# Altium PCB Prosthetic_Arm_PCB.PcbDoc
Units mm, origin at the board's own origin, x right, y up, seen from the top; angles counter-clockwise.
Board outline 72.9 x 89.79 mm, 2 copper layers (Top Layer, Bottom Layer), stack 1.671 mm thick; 4 components, 5 nets, 25 pads, 0 vias.
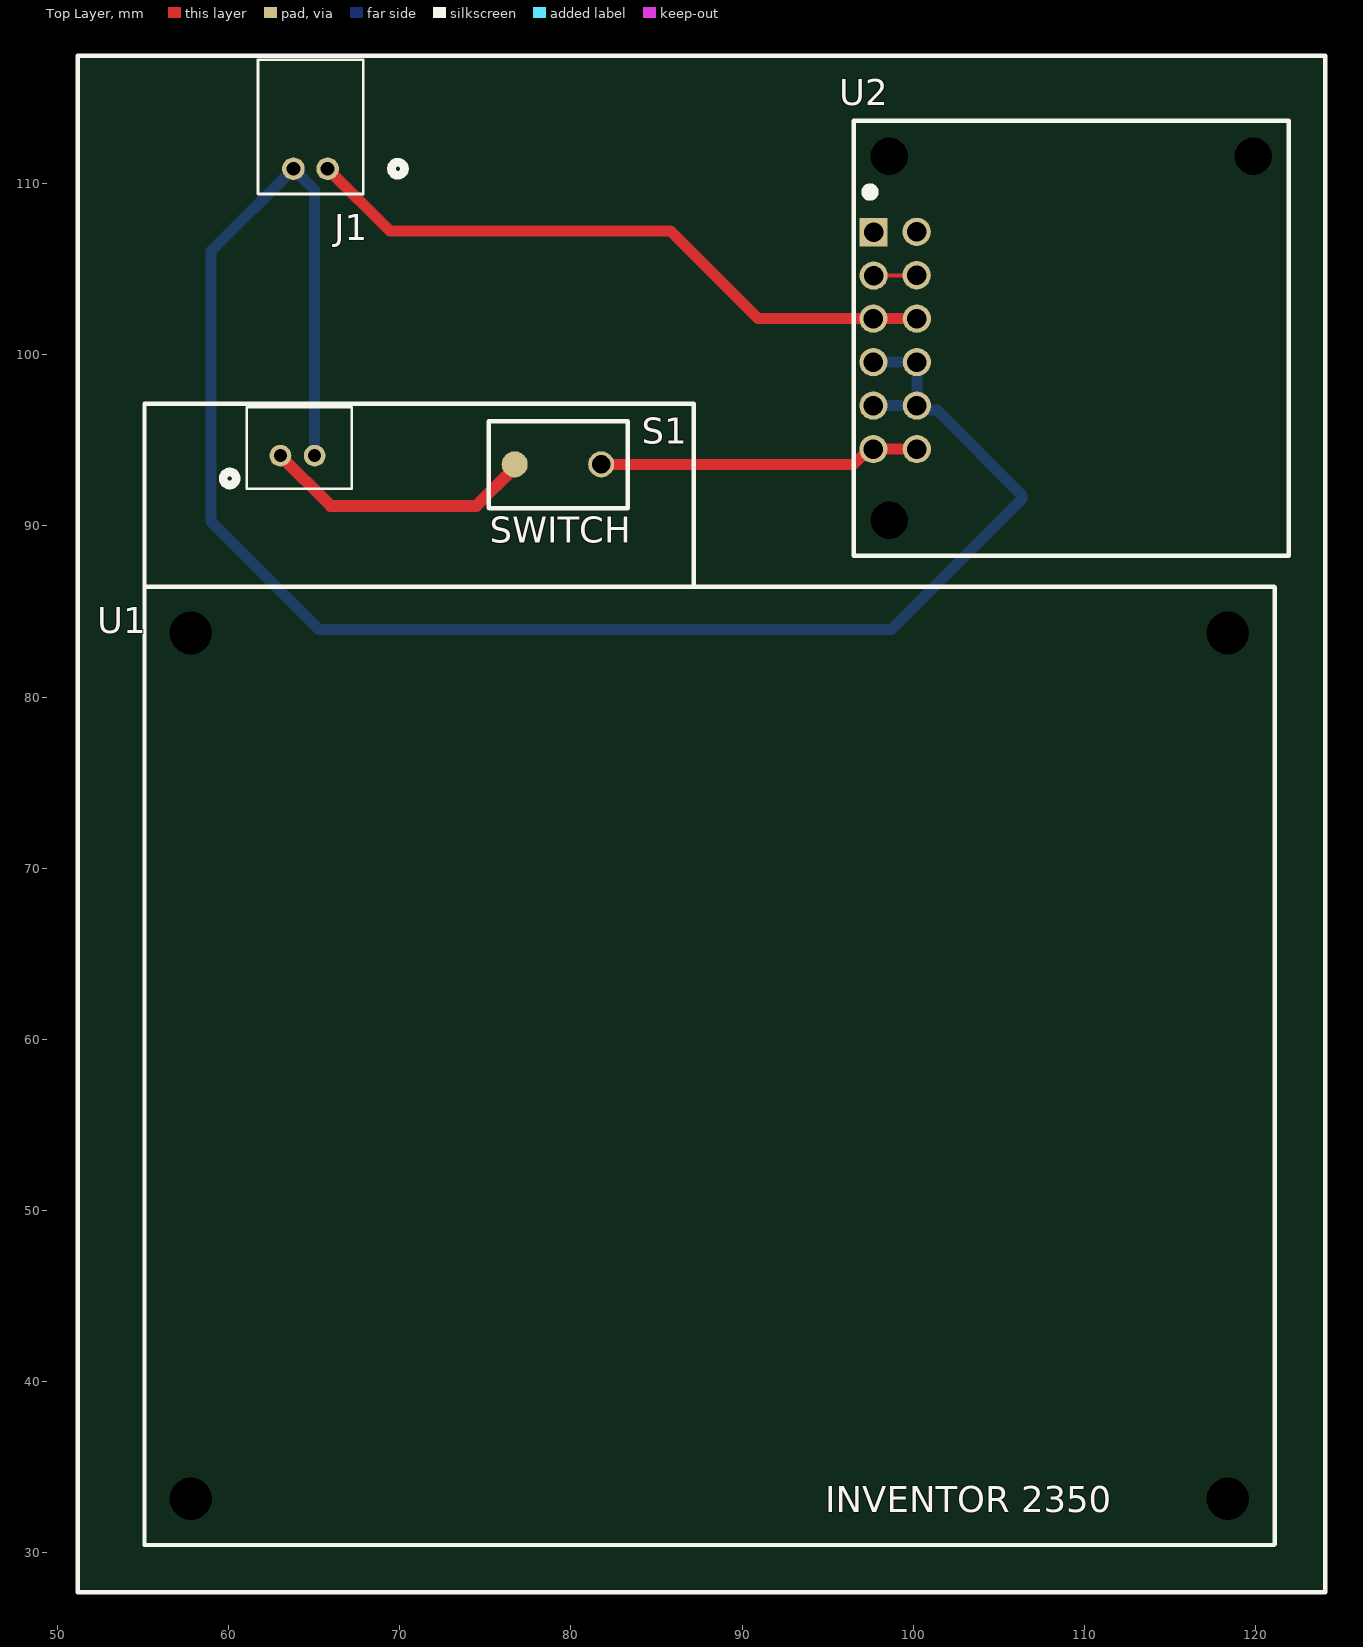
[diagram p0: Top Layer view]
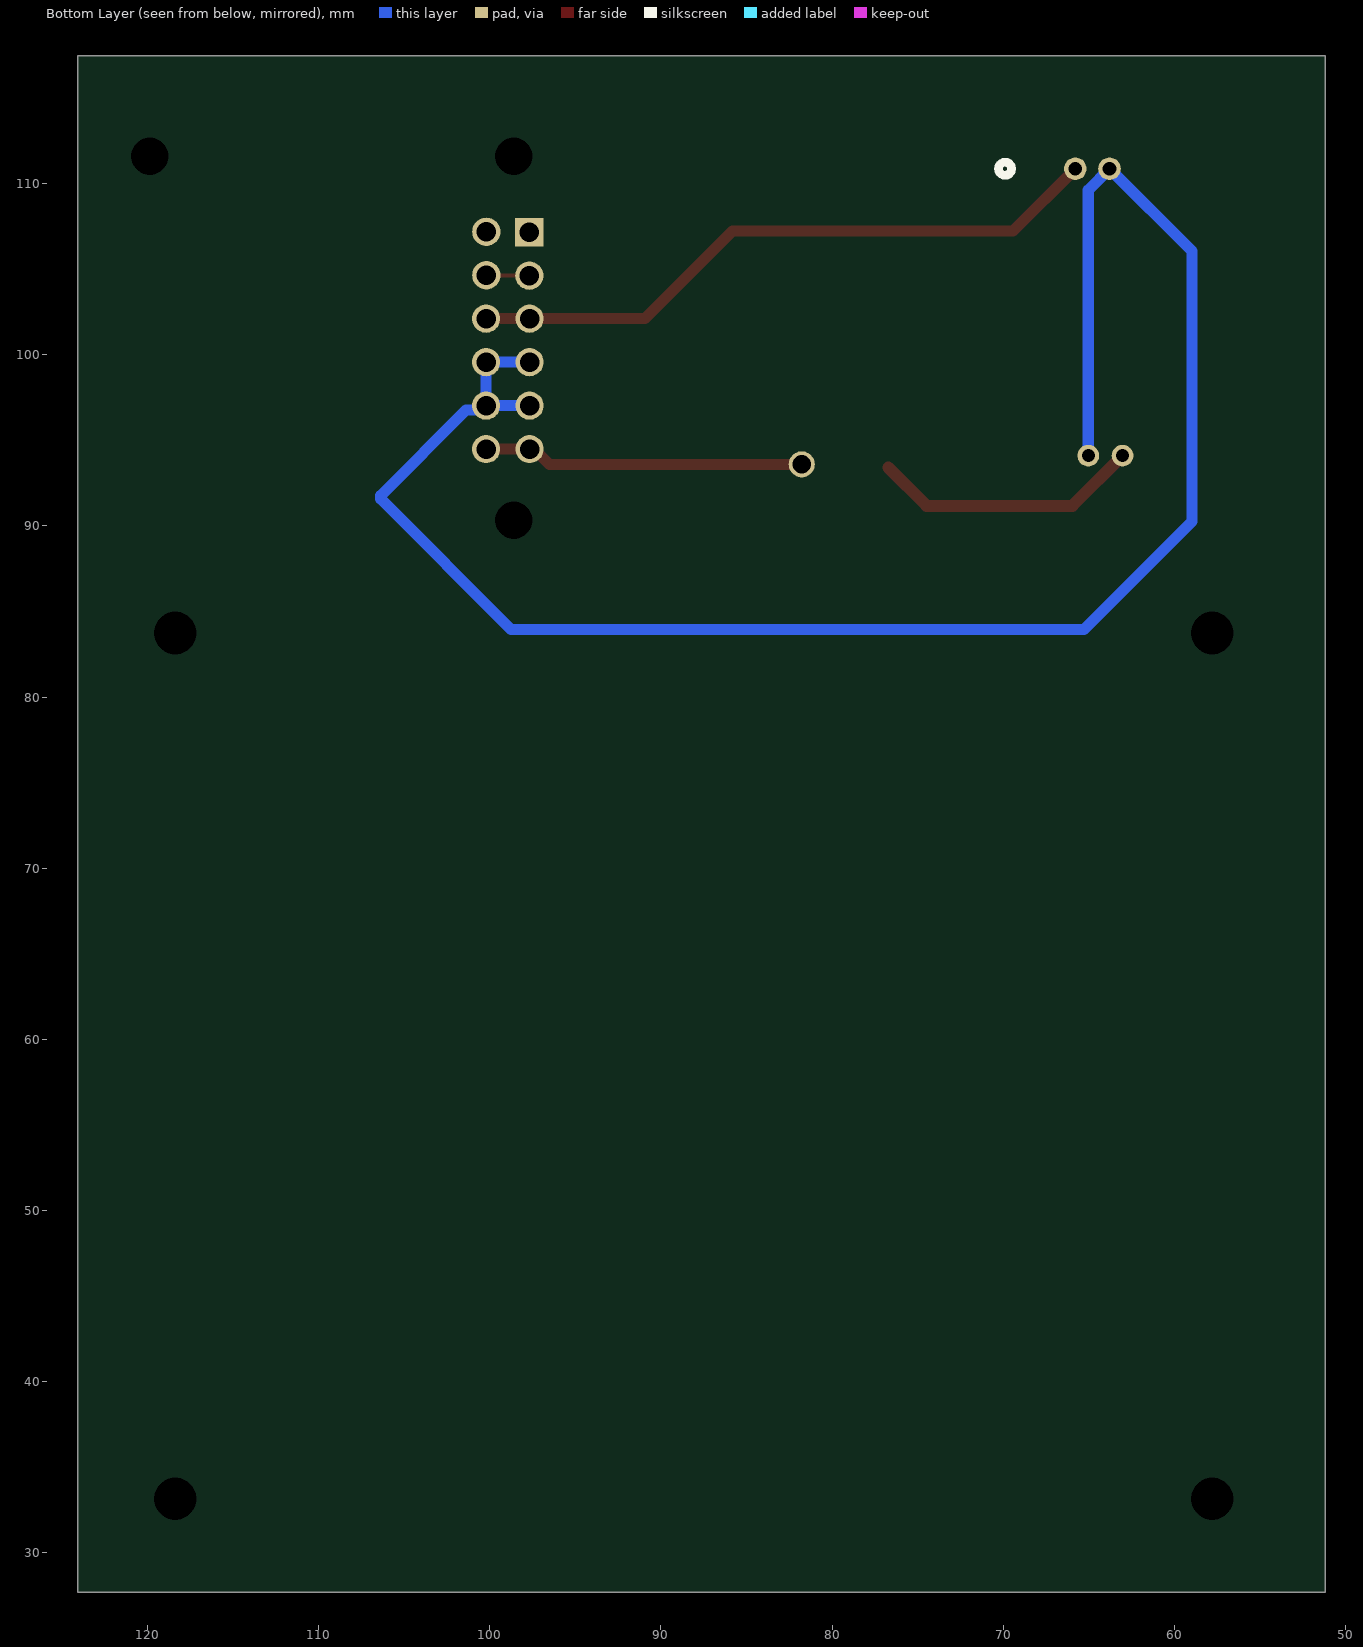
[diagram p1: Bottom Layer view, seen from below]
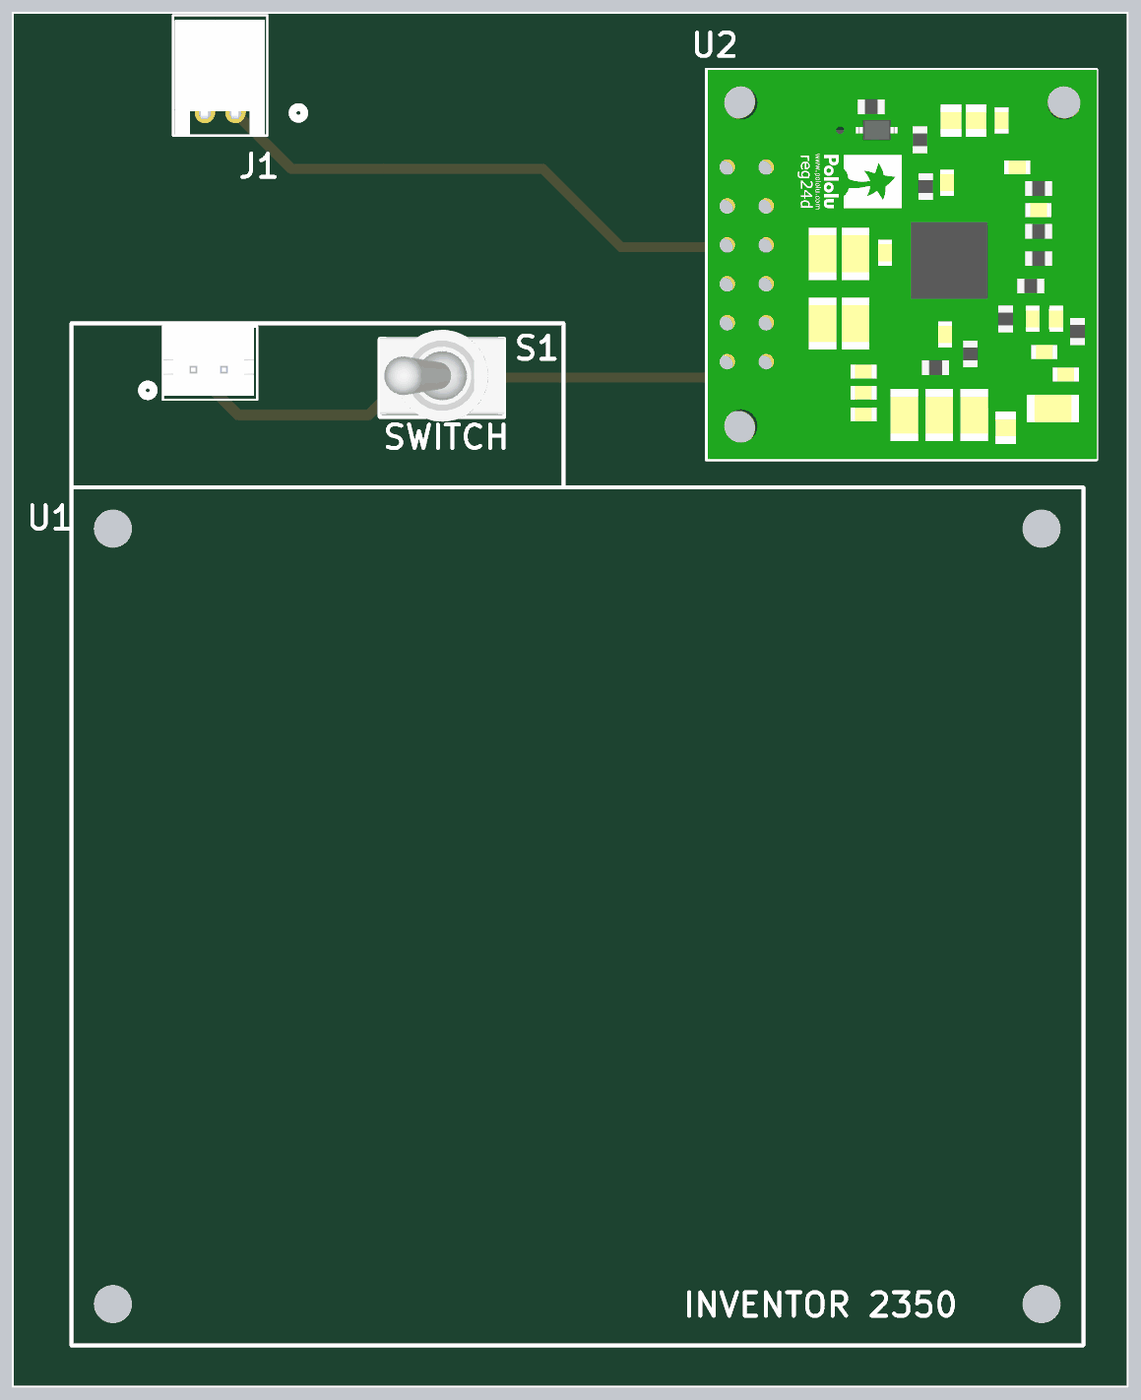
[diagram p2: 3D render of the assembled board from above, using the file's embedded part models]

## Layer stack, top to bottom
Top Solder: solder mask 0.0102, Solder Resist, Dk 3.5
Top Layer: signal copper 0.0356
Dielectric 1: dielectric 1.6, FR-4, Dk 4.8
Bottom Layer: signal copper 0.0356
Bottom Solder: solder mask 0.0102, Solder Resist, Dk 3.5

## Board outline
51.181,27.686 51.181,117.475 124.079,117.475 124.079,27.686

## Design rules (kind name [scope] priority, off if disabled: settings)
Clearance [All] p1: gap=0.254 ignorepadtopadclearanceinfootprint=FALSE
PolygonConnect [All] p1: connectstyle=Relief reliefconductorwidth=0.254 reliefentries=4 polygonreliefangle="90 Angle" airgapwidth=0.254
RoutingVias [All] p1: holewidth=0.711 width=1.27 viastyle="Through Hole" minholewidth=0.711 minwidth=1.27 maxholewidth=0.711 maxwidth=1.27
SolderMaskExpansion [All] p1: expansion=0 istentingtop=FALSE
Width [All] p1: maxlimit=1 minlimit=0.254 preferedwidth=0.254
30 further rules are at their usual default settings.

## Components (designator, comment, footprint, x,y, rotation, side; value= is the part's Value field where it differs from the comment)
J1 "S2B-PH-K-S(LF)(SN)" CONN_S2B-PH-K-S_JST 65.786,110.871 r180 top
S1 "200MSP6T1B1M5RE" SWITCH 78.875,93.7 r0 top
U1 "Inventor 2350" INVENTOR_2350 55.085,30.447 r0 top
U2 "" D36V50F5_ 111.252,108.585 r270 top

## Footprints (in the part's own frame and the unit in brackets; to place one, negate y for a bottom-side part, rotate by r counter-clockwise, add the part's x,y. Pads: shape width x height; smd on the part's side, far side on the other; paste and mask are expansions set on the pad)
CONN_S2B-PH-K-S_JST [mil]
  round 52 hole 32 paste-99999 mask+0: 1(0,0) 2(78.74,0)
  silkscreen extent -177,-251 160,58, body extent -76,-240 156,59, height 189
D36V50F5_ [mil]
  round 60 hole 85.83 paste-99999 mask+0: 1(-119.09,339.57) 2(-119.09,-498.03) 3(718.5,-498.03)
  round 65 / inner round 60 / far side round 65 hole 45 paste-99999 mask+0: 1(554.92,-434.45) 2(554.92,-534.45) 3(454.92,-434.45) 4(454.92,-534.45) 5(354.92,-434.45) 6(354.92,-534.45) 7(254.92,-434.45) 8(254.92,-534.45) 9(155,-435) 10(156,-534) 11(55,-435)
  rect 65x65 / inner round 60 / far side rect 65x65 hole 45 paste-99999 mask+0: 12(56,-534)
  silkscreen extent -201,-580 800,421, body extent -201,-577 799,423, height 133
INVENTOR_2350 [mm]
  round 1.27 hole 0.762 paste-2539.97 mask+0: 1(7.94,63.658) 2(9.94,63.658)
  round 1.524 hole 2.5 unplated: 3(2.7,53.3) 4(2.7,2.7) 5(63.3,2.7) 6(63.3,53.3)
  silkscreen extent 0,0 66.04,66.7, body extent 6,61.97 11.9,66.48, height 6
SWITCH [mil]
  round 60 smd: 1(-85,-4)
  round 60 hole 42.91: 2(114,-4)
  silkscreen extent -145,-105 175,95, body extent -144,-117 176,119, height 927

## Part data
J1: library part S2B-PH-K-SLFSN, "CONNECTOR; MALE; THROUGH HOLE; 2.0MM PITCH; DISCONNECTABLE CRIMP STYLE CONNECTOR; SIDE ENTRY TYPE; RIGHT ANGLE; 2PINS", Manufacturer_Name=JST, Copyright="Copyright (C) 2025 Ultra Librarian. All rights reserved.", Manufacturer_Part_Number=S2B-PH-K-S(LF)(SN), RefDes=RefDes, Type=Type
S1: "SPST Switch"
U2: library part D36V50F5, "5V, 5.5A Step-Down Voltage Regulator D36V50F5"

## Nets (pads, with @x,y where several pads share a name; then routed paths per layer and width w, separated by ;. In a path a pad name is that pad's centre, name@x,y a point inside that pad or via, vN(x,y) a via of type N, cw(c..) or ccw(c..) an arc to the next point about the centre after c; other vN are vias at no path point)
5V: S1.2 U2.1@100.217,94.49 U2.2@97.677,94.49 | length 18.8
  Top Layer w0.65: S1.2 96.515,93.598 97.406,94.49 97.677,94.49 U2.1@100.217,94.49
7v4: J1.1 U2.7 U2.8 | length 38.1
  Top Layer w0.65: J1.1 69.432,107.225 85.825,107.225 90.94,102.11 U2.8 U2.7
GND: J1.2 U1.2 U2.3@100.217,97.03 U2.4 U2.5 U2.6 | length 109.2
  Bottom Layer w0.65: U1.2 65.025,109.632 J1.2 58.975,106.06 58.975,90.25 65.278,83.947 98.747,83.947 106.37,91.57 106.37,91.78 101.387,96.763 100.484,96.763 U2.3@100.217,97.03 ; U2.4 U2.3@100.217,97.03 ; U2.6 U2.5 U2.3@100.217,97.03
VIN: S1.1 U1.1 | length 16
  Top Layer w0.254: S1.1@76.716,93.416 S1.1
  Top Layer w0.7: U1.1 65.955,91.175 74.475,91.175 S1.1@76.716,93.416
Vrp: U2.9 U2.10 | length 2.5
  Top Layer w0.254: U2.10 97.701,104.635 100.19,104.635 U2.9
pads on no net: U1.3 U1.4 U1.5 U1.6 U2.1@119.877,111.61 U2.2@98.602,111.61 U2.3@98.602,90.335 U2.11 U2.12

## Silkscreen, mask and mechanical layers (free items; w line width, h text height)
Top Overlay:
  lines w0.254: 51.181,27.686 51.181,117.475 53.213,117.475 124.079,117.475 124.079,27.686 51.181,27.686

## Text inside footprints (layer, text, board x,y; h text height)
S1: Top Overlay "SWITCH" at 75.27,89.002 h1.52
U1: Top Overlay "INVENTOR 2350" at 94.864,32.376 h1.52